# Altium PCB COMS0005_Coms_Test_Board.PcbDoc
Units mm, origin at the board's own origin, x right, y up, seen from the top; angles counter-clockwise.
Board outline 90 x 90 mm, 2 copper layers (Top Layer, Bottom Layer); 74 components, 93 nets, 358 pads, 74 vias.
Unrouted connection lines stored in the file: 2.
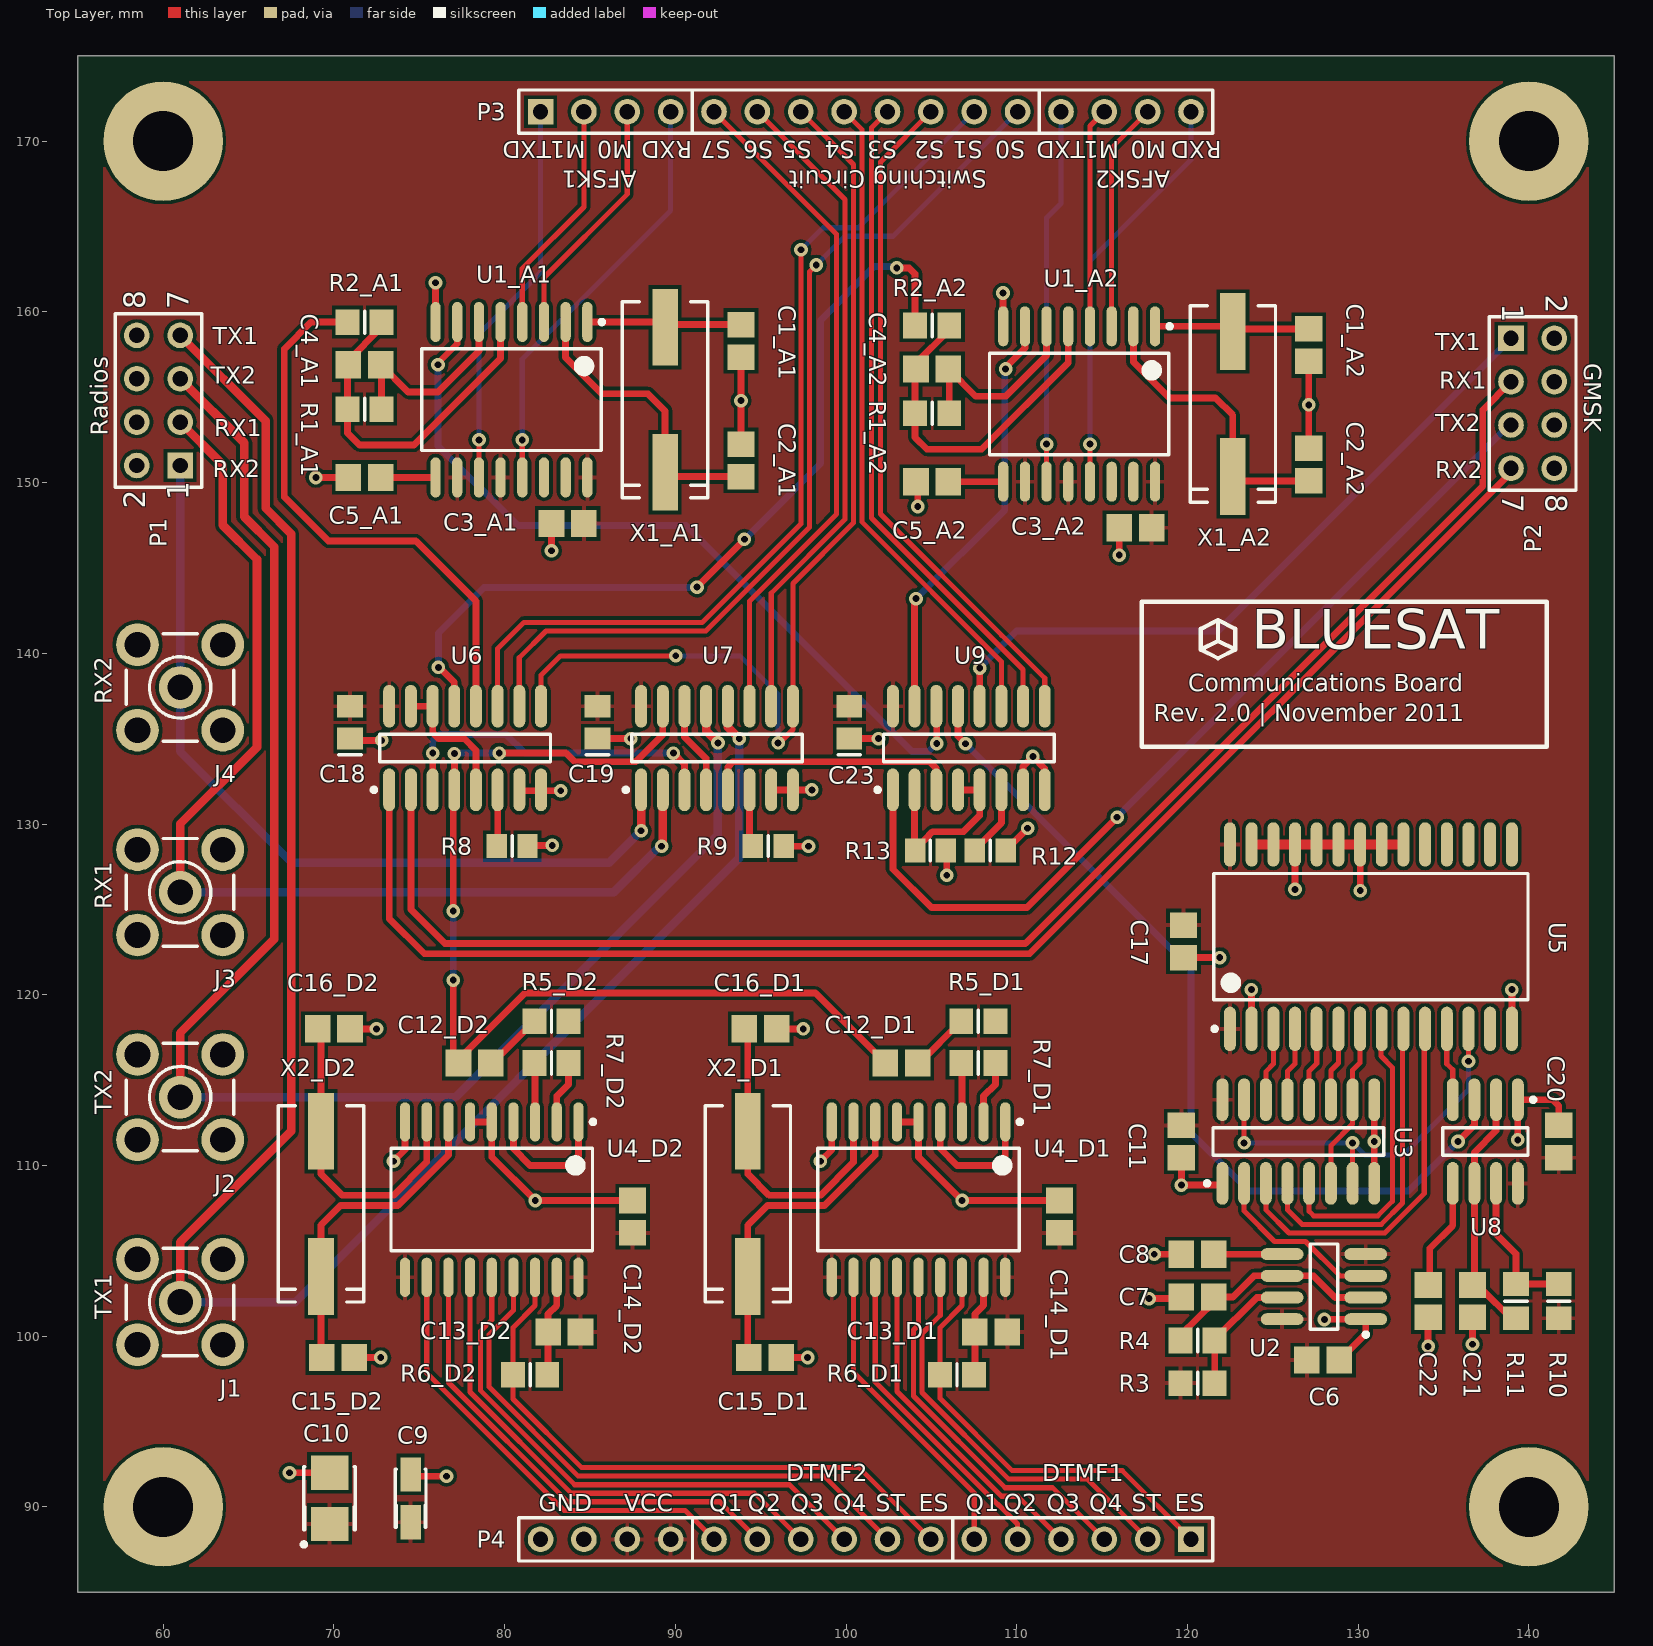
[diagram p0: Top Layer view]
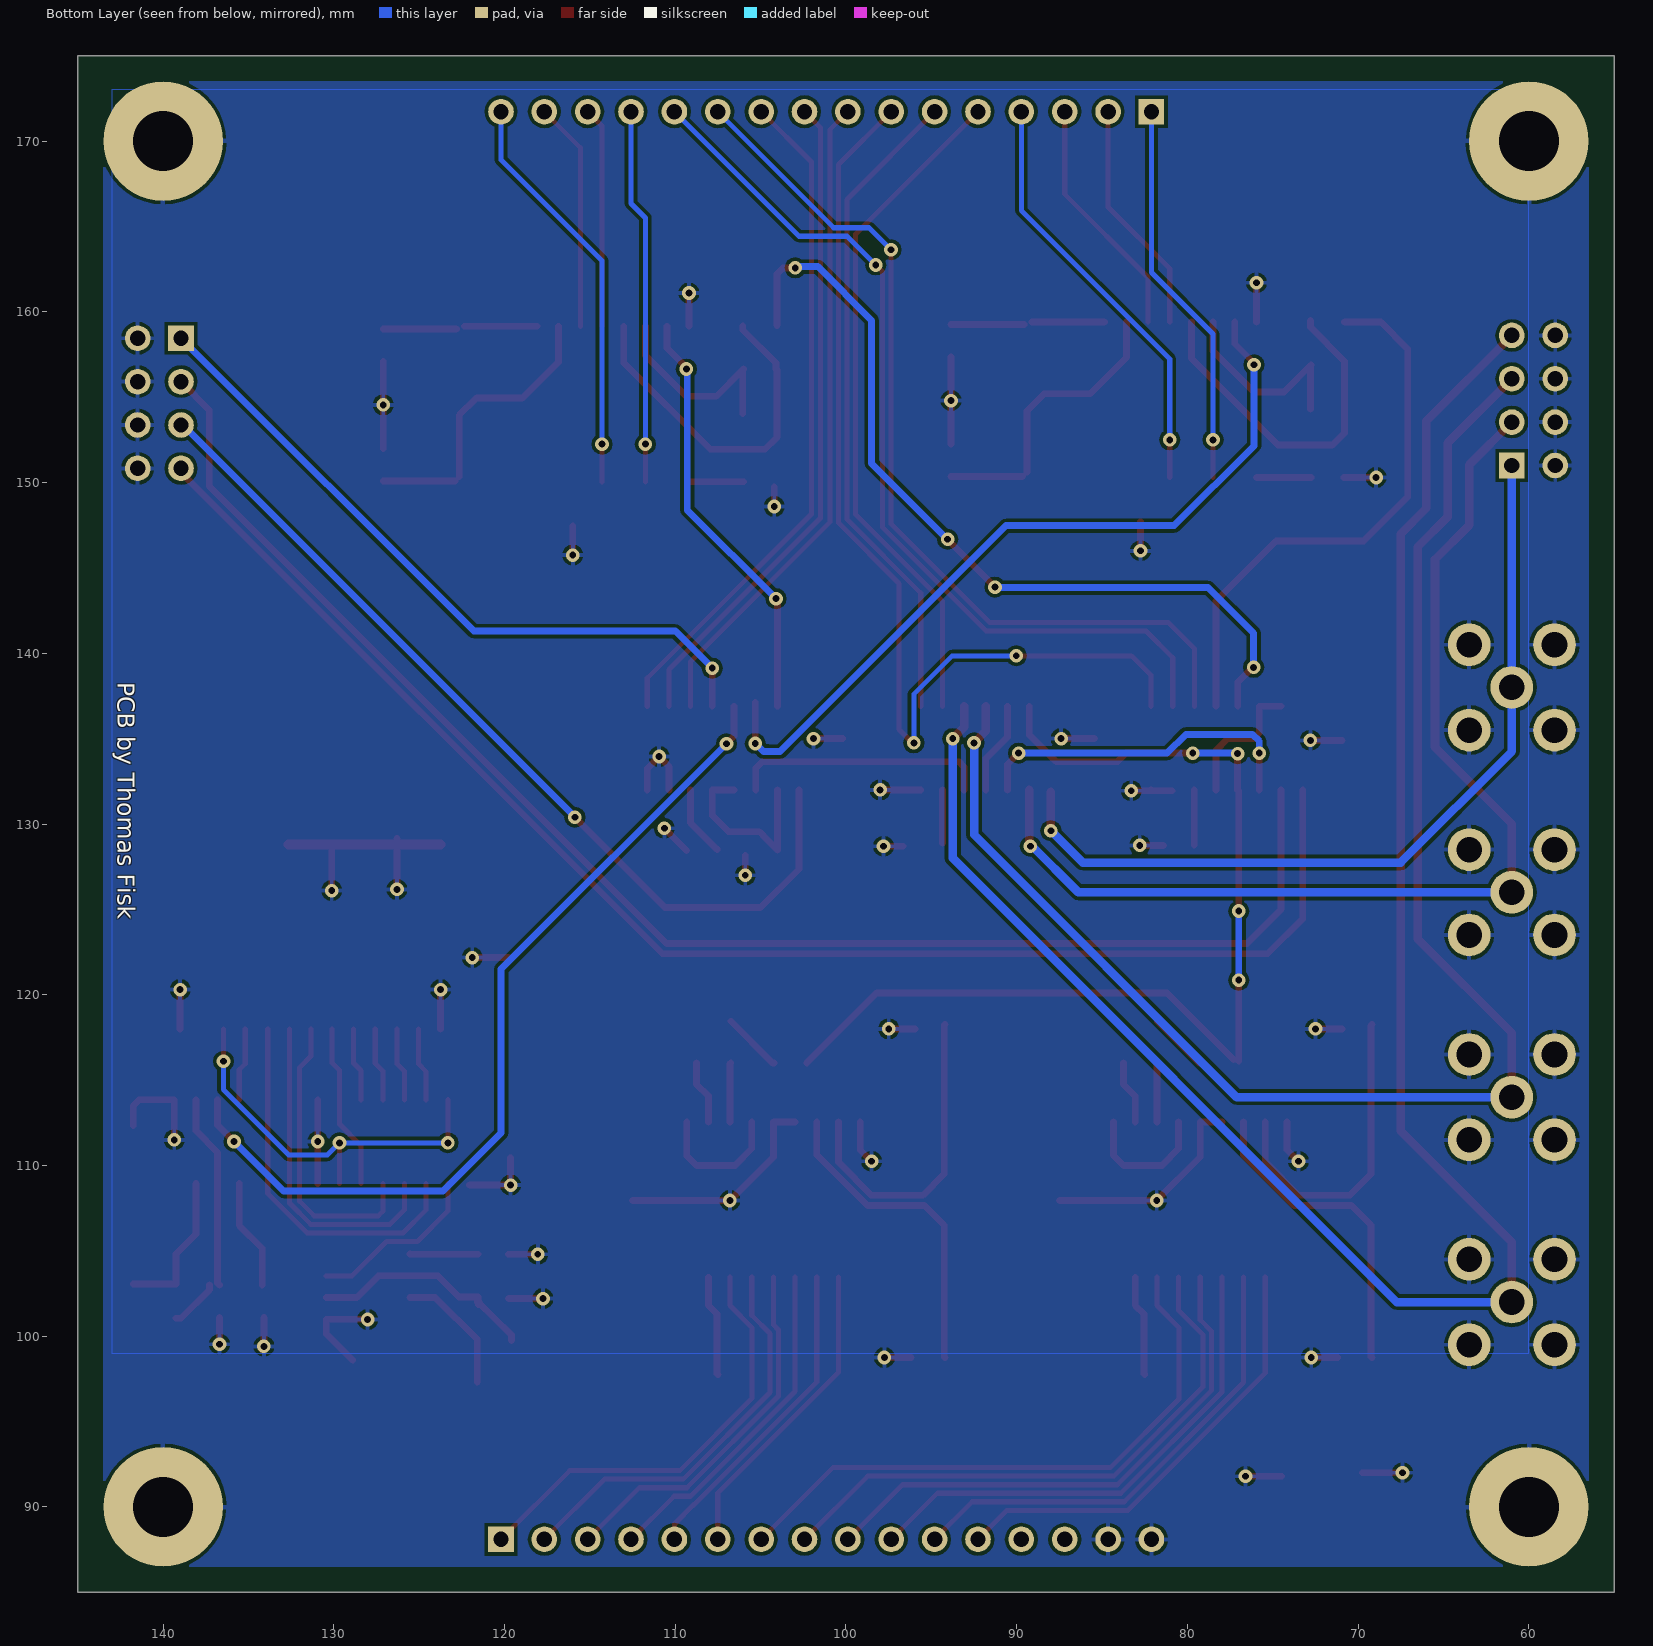
[diagram p1: Bottom Layer view, seen from below]

## Layer stack, top to bottom
Top Layer: signal copper 0.0356
Dielectric: dielectric 0.32, FR-4, Dk 4.8
Bottom Layer: signal copper 0.0356

## Board outline
55,175 145,175 145,85 55,85

## Design rules (kind name [scope] priority, off if disabled: settings)
AssemblyTestPointUsage [All] p1 off:
AssemblyTestpoint [All] p1 off: testpointundercomponent=TRUE minsize=1.016 maxsize=2.54 preferedsize=1.524 minholesize=0 maxholesize=1.016 preferedholesize=0.813 testpointgrid=0.025 usegrid=TRUE gridtolerance=0 allowsidetop=TRUE allowsidebottom=TRUE
Clearance [All] p1: gap=0.2
FabricationTestPointUsage [All] p1 off: valid=0 allowmultiple=FALSE
FabricationTestpoint [All] p1 off: side=3 testpointundercomponent=TRUE minsize=1.016 maxsize=2.54 preferedsize=1.524 minholesize=0 maxholesize=1.016 preferedholesize=0.813 testpointgrid=0.025 allowsidetop=TRUE allowsidebottom=TRUE usegrid=TRUE gridtolerance=0
HoleSize [All] p1: absolutevalues=TRUE maxlimit=6 minlimit=0.025 maxpercent=80.000 minpercent=20.000
MinimumSolderMaskSliver [All] p1: minsoldermaskwidth=0.19
PolygonConnect [All] p1: connectstyle=Relief reliefconductorwidth=0.254 reliefentries=4 polygonreliefangle="90 Angle"
RoomDefinition Switching_Circuit [InComponentClass('Components Class 1')] p1: confinementstyle=ConfineIn formatcopy=TRUE lockcomponents=FALSE outline 114.49,126.85 68.59,126.85 68.59,141.65 114.49,141.65
RoomDefinition D2 [InComponentClass('D2')] p2: confinementstyle=ConfineIn formatcopy=TRUE lockcomponents=FALSE outline 66.25,95 91,95 91,121.75 66.25,121.75
RoomDefinition D1 [InComponentClass('D1')] p3: confinementstyle=ConfineIn formatcopy=TRUE lockcomponents=FALSE outline 91.25,95 116,95 116,121.75 91.25,121.75
RoomDefinition Beacon [InComponentClass('Beacon')] p4: confinementstyle=ConfineIn formatcopy=TRUE lockcomponents=FALSE outline 114.87,95 145.345,95 145.345,131.175 114.87,131.175
RoomDefinition A2 [InComponentClass('A2')] p5: confinementstyle=ConfineIn formatcopy=TRUE lockcomponents=FALSE outline 100.25,144.75 131.05,144.75 131.05,163.75 100.25,163.75
RoomDefinition A1 [InComponentClass('A1')] p6: confinementstyle=ConfineIn formatcopy=TRUE lockcomponents=FALSE outline 67,145 97.8,145 97.8,164 67,164
RoutingVias [All] p1: holewidth=0.4 width=0.8 viastyle="Through Hole" minholewidth=0.4 minwidth=0.8 maxholewidth=0.4 maxwidth=0.8
SilkToSilkClearance [All] p1 off: silktosilkclearance=0.196
SilkscreenOverComponentPads [All] p1 off: minsilkscreentomaskgap=0.19
SolderMaskExpansion [All] p1: expansion=0.102
UnConnectedPin [All] p1 off:
Width [All] p1: maxlimit=1 minlimit=0.2 preferedwidth=0.2
20 further rules are at their usual default settings.

## Classes and differential pairs
component class A1: C1_A1 C2_A1 C3_A1 C4_A1 C5_A1 R1_A1 R2_A1 U1_A1 X1_A1
component class A2: C1_A2 C2_A2 C3_A2 C4_A2 C5_A2 R1_A2 R2_A2 U1_A2 X1_A2
component class COMS0005_Comms_Test_Board: C9 C10 J1 J2 J3 J4 P1 P2 P3 P4
component class D1: C12_D1 C13_D1 C14_D1 C15_D1 C16_D1 R5_D1 R6_D1 R7_D1 U4_D1 X2_D1
component class D2: C12_D2 C13_D2 C14_D2 C15_D2 C16_D2 R5_D2 R6_D2 R7_D2 U4_D2 X2_D2
net class ADDRESS[7..0]: ADDRESS0 ADDRESS1 ADDRESS2 ADDRESS3 ADDRESS4 ADDRESS5 ADDRESS6 ADDRESS7
net class SWC[7..0]: SWC0 SWC1 SWC2 SWC3 SWC4 SWC5 SWC6 SWC7
component class Beacon: C6 C7 C8 C11 C17 C20 C21 C22 R3 R4 R10 R11 U2 U3 U5 U8
channel class COMS0002_AFSK: A1 A2
channel class COMS0003_DTMF: D1 D2
component class U_ModemRXMux: C18 R8 U6
component class U_RadioMux: C19 R9 U7
component class U_TXDevMux: C23 R12 R13 U9

## Components (designator, comment, footprint, x,y, rotation, side; value= is the part's Value field where it differs from the comment)
C1_A1 "Cap" CAPC2012M 93.85,158.3 r90 top (schematic designator C1)
C1_A2 "Cap" CAPC2012M 127.1,158.05 r90 top (schematic designator C1)
C2_A1 "Cap" CAPC2012M 93.85,151.3 r270 top (schematic designator C2)
C2_A2 "Cap" CAPC2012M 127.1,151.05 r270 top (schematic designator C2)
C3_A1 "Cap" CAPC2012M 83.7,147.6 r180 top (schematic designator C3)
C3_A2 "Cap" CAPC2012M 116.95,147.35 r180 top (schematic designator C3)
C4_A1 "Cap" CAPC2012M 71.8,156.9 r180 top (schematic designator C4)
C4_A2 "Cap" CAPC2012M 105.05,156.65 r180 top (schematic designator C4)
C5_A1 "Cap" CAPC2012M 71.8,150.3 r0 top (schematic designator C5)
C5_A2 "Cap" CAPC2012M 105.05,150.05 r0 top (schematic designator C5)
C6 "C0805" CAPC2012M 127.945,98.6 r180 top
C7 "Cap1u" CAPC2012M 120.595,102.3 r0 top
C8 "Cap" CAPC2012M 120.595,104.8 r0 top
C9 "T491A" A 74.5,90.5 r90 top
C10 "T491B" B 69.75,90.5 r90 top
C11 "C0805" CAPC2012M 119.645,111.4 r90 top
C12_D1 "Cap" CAPC2012M 103.25,116 r180 top (schematic designator C12)
C12_D2 "Cap" CAPC2012M 78.25,116 r180 top (schematic designator C12)
C13_D1 "Cap" CAPC2012M 108.5,100.25 r0 top (schematic designator C13)
C13_D2 "Cap" CAPC2012M 83.5,100.25 r0 top (schematic designator C13)
C14_D1 "Cap" CAPC2012M 112.5,107 r90 top (schematic designator C14)
C14_D2 "Cap" CAPC2012M 87.5,107 r90 top (schematic designator C14)
C15_D1 "Cap" CAPC2012M 95.25,98.75 r0 top (schematic designator C15)
C15_D2 "Cap" CAPC2012M 70.25,98.75 r0 top (schematic designator C15)
C16_D1 "Cap" CAPC2012M 95,118 r0 top (schematic designator C16)
C16_D2 "Cap" CAPC2012M 70,118 r0 top (schematic designator C16)
C17 "C0805" CAPC2012M 119.77,123.125 r90 top
C18 "C1210" 0805 70.945,135.95 r90 top
C19 "C1210" 0805 85.445,135.95 r90 top
C20 "C0805" CAPC2012M 141.745,111.4 r270 top
C21 "Cap" CAPC2012M 136.695,102.05 r90 top
C22 "Cap" CAPC2012M 134.095,102.05 r90 top
C23 "C1210" 0805 100.195,135.95 r90 top
J1 "TX1" SMB_V-RJ45 61,102 r0 top (schematic designator J2)
J2 "TX2" SMB_V-RJ45 61,114 r180 top (schematic designator J4)
J3 "RX2" SMB_V-RJ45 61,126 r180 top (schematic designator J1)
J4 "RX1" SMB_V-RJ45 61,138 r0 top (schematic designator J3)
P1 "Header 4X2" HDR2X4 61,151 r90 top
P2 "Header 4X2" HDR2X4 138.95,158.45 r270 top
P3 "Header 16" HDR1X16 82.11,171.72 r0 top
P4 "Header 16" HDR1X16 120.21,88.1 r180 top
R1_A1 "Res1" RESC2012M 71.8,154.3 r180 top (schematic designator R1)
R1_A2 "Res1" RESC2012M 105.05,154.05 r180 top (schematic designator R1)
R2_A1 "Res1" RESC2012M 71.8,159.4 r0 top (schematic designator R2)
R2_A2 "Res1" RESC2012M 105.05,159.2 r0 top (schematic designator R2)
R3 "Res2" RESC2012M 120.595,97.25 r180 top
R4 "Res1" RESC2012M 120.595,99.75 r0 top
R5_D1 "Res1" RESC2012M 107.75,118.45 r180 top (schematic designator R5)
R5_D2 "Res1" RESC2012M 82.75,118.45 r180 top (schematic designator R5)
R6_D1 "Res1" RESC2012M 106.5,97.75 r0 top (schematic designator R6)
R6_D2 "Res1" RESC2012M 81.5,97.75 r0 top (schematic designator R6)
R7_D1 "Res1" RESC2012M 107.75,116 r0 top (schematic designator R7)
R7_D2 "Res1" RESC2012M 82.75,116 r0 top (schematic designator R7)
R8 "Res1" RESC2012N 80.445,128.7 r180 top
R9 "Res1" RESC2012N 95.445,128.7 r0 top
R10 "Res2" RESC2012M 141.745,102.05 r270 top
R11 "Res1" RESC2012M 139.245,102.05 r90 top
R12 "Res1" RESC2012N 108.445,128.45 r180 top
R13 "Res1" RESC2012N 104.945,128.45 r180 top
U1_A1 "MX614" SOIC127P1030X270-16N 80.405,154.85 r270 top (schematic designator U1)
U1_A2 "MX614" SOIC127P1030X270-16N 113.655,154.6 r270 top (schematic designator U1)
U2 "TLC555CD" D008_M 127.995,102.9 r180 top
U3 "HCC4520BF" SOIC16_M 126.495,111.4 r90 top
U4_D1 "MT88L70AS" SOIC18_N 104.25,108 r270 top (schematic designator U4)
U4_D2 "MT88L70AS" SOIC18_N 79.25,108 r270 top (schematic designator U4)
U5 "M27C256B-10B1" SOIC127P1199-28AM 130.745,123.4 r90 top
U6 "CD4053BCM" M16A_M 77.69,134.45 r90 top
U7 "CD4053BCM" M16A_M 92.445,134.45 r90 top
U8 "TLC555CD" D008_M 137.445,111.4 r270 top
U9 "CD4051BCM" M16A_M 107.195,134.45 r90 top
X1_A1 "3.579545 MHz" CSM-7 89.405,154.85 r90 top (schematic designator X1)
X1_A2 "3.579545 MHz" CSM-7 122.655,154.6 r90 top (schematic designator X1)
X2_D1 "3.579545 MHz" CSM-7 94.25,107.75 r90 top (schematic designator X2)
X2_D2 "3.579545 MHz" CSM-7 69.25,107.75 r90 top (schematic designator X2)

## Footprints (in the part's own frame and the unit in brackets; to place one, negate y for a bottom-side part, rotate by r counter-clockwise, add the part's x,y. Pads: shape width x height; smd on the part's side, far side on the other; paste and mask are expansions set on the pad)
0805 [mm] "Chip Capacitor; Body 2.0 x 1.2 mm (LxW typ)"
  rect 1.3x1.5 smd: 1(-0.95,0) 2(0.95,0)
  silkscreen extent -1.9,-0.65 -1.9,0.65
A [mm] "Capacitor, SM Tantalum; Body 3.2 x 1.6 mm (LxW typ)"
  rect 2x1.2 smd: 1(-1.4,0) 2(1.4,0)
  silkscreen extent -1.7,-0.9 1.7,0.9
B [mm] "Capacitor, SM Tantalum; Body 3.5 x 2.8 mm (LxW typ)"
  rect 2x2.2 smd: 1(-1.5,0) 2(1.5,0)
  silkscreen extent -2.82,-1.5 1.85,1.62
CAPC2012M [mm] "Chip Capacitor, Body 2.0x1.3mm, IPC Low Density"
  rect 1.5x1.6 smd: 1(-0.95,0) 2(0.95,0)
  body extent -1.1,-0.72 1.1,0.72, height 1.1
CSM-7 [mm] "Quartz Crystal, SM; 2 Leads; Body 11.4 x 4.8 x 5 mm (LxWxH)"
  rect 4.5x1.5 smd: 1(-4.25,0) 2(4.25,0)
  silkscreen extent -5.75,-2.5 5.75,2.5
D008_M [mm] "SOIC, 8-Leads, Body 4.9x3.9mm, Pitch 1.27mm, IPC Low Density"
  oval 2.5x0.7 smd: 1(-2.45,1.905) 2(-2.45,0.635) 3(-2.45,-0.635) 4(-2.45,-1.905) 5(2.45,-1.905) 6(2.45,-0.635) 7(2.45,0.635) 8(2.45,1.905)
  silkscreen extent -2.58,-2.5 0.8,2.93, body extent -2,-2.5 2,2.5, height 1.75
HDR1X16 [mm] "Connector; Header; 16 Position"
  rect 1.5x1.5 hole 0.9: 1(0,0)
  round 1.5 hole 0.9: 2(2.54,0) 3(5.08,0) 4(7.62,0) 5(10.16,0) 6(12.7,0) 7(15.24,0) 8(17.78,0) 9(20.32,0) 10(22.86,0) 11(25.4,0) 12(27.94,0) 13(30.48,0) 14(33.02,0) 15(35.56,0) 16(38.1,0)
  silkscreen extent -1.27,-1.27 39.37,1.27
HDR2X4 [mm] "Connector; Header; 4x2 Position"
  rect 1.5x1.5 hole 0.9: 1(0,0)
  round 1.5 hole 0.9: 2(0,2.54) 3(2.54,0) 4(2.54,2.54) 5(5.08,0) 6(5.08,2.54) 7(7.62,0) 8(7.62,2.54)
  silkscreen extent -1.27,-1.27 8.89,3.81
M16A_M [mm] "SOIC, 16-Leads, Body 9.9x3.9mm, Pitch 1.27mm, IPC Low Density"
  oval 2.5x0.7 smd: 1(-2.45,4.445) 2(-2.45,3.175) 3(-2.45,1.905) 4(-2.45,0.635) 5(-2.45,-0.635) 6(-2.45,-1.905) 7(-2.45,-3.175) 8(-2.45,-4.445) 9(2.45,-4.445) 10(2.45,-3.175) 11(2.45,-1.905) 12(2.45,-0.635) 13(2.45,0.635) 14(2.45,1.905) 15(2.45,3.175) 16(2.45,4.445)
  silkscreen extent -2.57,-5 0.8,5.47, body extent -2,-5 2,5, height 1.75
RESC2012M [mm] "Chip Resistor, Body 2.0x1.3mm, IPC Low Density"
  rect 1.4x1.5 smd: 1(-1,0) 2(1,0)
  silkscreen extent 0,-0.65 0,0.65, body extent -1.07,-0.7 1.07,0.7, height 0.65
RESC2012N [mm] "Chip Resistor, Body 2.0x1.3mm, IPC Medium Density"
  rect 1.2x1.4 smd: 1(-0.9,0) 2(0.9,0)
  silkscreen extent 0,-0.6 0,0.6, body extent -1.07,-0.7 1.07,0.7, height 0.65
SMB_V-RJ45 [mm] "Connector; SMB Straight"
  round 2.5 hole 1.5: 1(0,0) 2(-2.5,-2.5) 2(-2.5,2.5) 2(2.5,-2.5) 2(2.5,2.5)
  silkscreen extent -3.15,-3.15 3.15,3.15
SOIC16_M [mm] "SOIC, 16-Leads, Body 9.9x3.9mm, Pitch 1.27mm, IPC Low Density"
  oval 2.5x0.7 smd: 1(-2.45,4.445) 2(-2.45,3.175) 3(-2.45,1.905) 4(-2.45,0.635) 5(-2.45,-0.635) 6(-2.45,-1.905) 7(-2.45,-3.175) 8(-2.45,-4.445) 9(2.45,-4.445) 10(2.45,-3.175) 11(2.45,-1.905) 12(2.45,-0.635) 13(2.45,0.635) 14(2.45,1.905) 15(2.45,3.175) 16(2.45,4.445)
  silkscreen extent -2.57,-5 0.8,5.47, body extent -2,-5 2,5, height 1.91
SOIC18_N [mm] "SOIC, 18-Leads, Body 11.6x7.6mm, Pitch 1.27mm, IPC Medium Density"
  oval 2.3x0.6 smd: 1(-4.55,5.08) 2(-4.55,3.81) 3(-4.55,2.54) 4(-4.55,1.27) 5(-4.55,0) 6(-4.55,-1.27) 7(-4.55,-2.54) 8(-4.55,-3.81) 9(-4.55,-5.08) 10(4.55,-5.08) 11(4.55,-3.81) 12(4.55,-2.54) 13(4.55,-1.27) 14(4.55,0) 15(4.55,1.27) 16(4.55,2.54) 17(4.55,3.81) 18(4.55,5.08)
  silkscreen extent -4.67,-5.9 3,6.06, body extent -3.8,-5.95 3.8,5.95, height 2.65
SOIC127P1030X270-16N [mm] "SOIC, 16-Leads, Body 10.5x7.6mm (max), Pitch 1.27mm, IPC Medium Density"
  oval 2.35x0.6 smd: 1(-4.55,4.445) 2(-4.55,3.175) 3(-4.55,1.905) 4(-4.55,0.635) 5(-4.55,-0.635) 6(-4.55,-1.905) 7(-4.55,-3.175) 8(-4.55,-4.445) 9(4.55,-4.445) 10(4.55,-3.175) 11(4.55,-1.905) 12(4.55,-0.635) 13(4.55,0.635) 14(4.55,1.905) 15(4.55,3.175) 16(4.55,4.445)
  silkscreen extent -4.67,-5.25 2.97,5.42, body extent -3.8,-5.25 3.8,5.25, height 2.7
SOIC127P1199-28AM [mm] "SOIC, 28-Leads, Body 18.4x7.5mm, Pitch 1.27mm, IPC Low Density"
  oval 2.6x0.7 smd: 1(-5.4,8.255) 2(-5.4,6.985) 3(-5.4,5.715) 4(-5.4,4.445) 5(-5.4,3.175) 6(-5.4,1.905) 7(-5.4,0.635) 8(-5.4,-0.635) 9(-5.4,-1.905) 10(-5.4,-3.175) 11(-5.4,-4.445) 12(-5.4,-5.715) 13(-5.4,-6.985) 14(-5.4,-8.255) 15(5.4,-8.255) 16(5.4,-6.985) 17(5.4,-5.715) 18(5.4,-4.445) 19(5.4,-3.175) 20(5.4,-1.905) 21(5.4,-0.635) 22(5.4,0.635) 23(5.4,1.905) 24(5.4,3.175) 25(5.4,4.445) 26(5.4,5.715) 27(5.4,6.985) 28(5.4,8.255)
  silkscreen extent -5.52,-9.2 3.7,9.28, body extent -4.51,-9.25 4.51,9.25, height 2.8

## Part data
C1_A1 C1_A2 C2_A1 C2_A2 C3_A1 C3_A2 C4_A1 C4_A2 C5_A1 C5_A2 C8 C12_D1 C12_D2 C13_D1 C13_D2 C14_D1 C14_D2 C15_D1 C15_D2 C16_D1 C16_D2 C21 C22: "Capacitor"
C6 C7 C11 C17 C18 C19 C20 C23: library part Cap, "Capacitor"
C9 C10: "Solid Tantalum Chip Capacitor, Standard T491 Series - Industrial Grade"
J1 J2 J3 J4: library part COAX-F, "RF Coaxial PCB Connector, MCX; Thru-Hole, Right-Angle Mount Socket, Blunt Post Terminal, 50 Ohm Impedance"
P1 P2: "Header, 4-Pin, Dual row"
P3 P4: "Header, 16-Pin"
R1_A1 R1_A2 R2_A1 R2_A2 R4 R5_D1 R5_D2 R6_D1 R6_D2 R7_D1 R7_D2 R11: "Resistor"
R3 R10: library part Res1, "Resistor"
R8 R9 R12 R13: library part Res2, "Resistor"
U1_A1 U1_A2: "Bell 202 Compatible Modem"
U2 U8: "LinCMOS Timer"
U3: "Dual Binary Up-Counter"
U4_D1 U4_D2: "3 Volt Integrated DTMF Receiver"
U5: "256 Kbit (32Kb X 8) UV EPROM and OTP EPROM"
U6 U7: "Triple 2-Channnel Analog Multiplexer/Demutiplexer"
U9: "8-Channel Analog Multiplexer/Demultiplexer"
X1_A1 X1_A2 X2_D1 X2_D2: library part ECS-110-S-5P, "Crystal Oscillator"

## Free pads (board coordinates)
  round 7 hole 3.5: 0(60,90) 0(60,170) 0(140,90) 0(140,170)

## Via types
v1: diameter 0.8, hole 0.4, Top Layer to Bottom Layer, 73 vias
v2: diameter 0.8, hole 0.4, Top Layer to Bottom Layer, tented top, 1 vias

## Nets (pads, with @x,y where several pads share a name; then routed paths per layer and width w, separated by ;. In a path a pad name is that pad's centre, name@x,y a point inside that pad or via, vN(x,y) a via of type N, cw(c..) or ccw(c..) an arc to the next point about the centre after c; other vN are vias at no path point)
ADDRESS0: U3.3 U5.10 | length 22
  Top Layer w0.3: U3.3 124.59,107.4 125.94,106.05 131.559,106.05 133.87,108.361 U5.10@133.87,118
ADDRESS1: U3.4 U5.9 | length 19.4
  Top Layer w0.3: U3.4 125.86,107.4 126.71,106.55 131.352,106.55 132.6,107.798 U5.9@132.6,118
ADDRESS2: U3.5 U5.8 | length 17.3
  Top Layer w0.3: U3.5 127.13,107.315 127.395,107.05 131.145,107.05 132,107.905 132,115.745 131.33,116.415 U5.8@131.33,118
ADDRESS3: U3.6 U3.10 U5.7 | length 9.8
  Top Layer w0.3: U3.6 128.4,111.155 129.67,112.425 U3.10 129.67,115.575 130.11,116.015 U5.7
ADDRESS4: U3.11 U5.6 | length 4.3
  Top Layer w0.3: U3.11 128.4,115.555 128.84,115.995 U5.6
ADDRESS5: U3.12 U5.5 | length 4.3
  Top Layer w0.3: U3.12 127.13,115.535 127.57,115.975 U5.5
ADDRESS6: U3.13 U5.4 | length 4.3
  Top Layer w0.3: U3.13 125.86,115.515 126.3,115.955 U5.4
ADDRESS7: U3.14 U5.3 | length 4.3
  Top Layer w0.3: U3.14 124.59,115.495 125.03,115.935 U5.3
AF: U8.3 U9.13 | length 51.8
  Top Layer w0.4: U9.13 106.56,135.14 v1(107,134.7) ; v1(135.845,111.4) 136.81,112.365 U8.3
  Bottom Layer w0.4: v1(107,134.7) 120.2,121.5 120.2,111.9 123.6,108.5 132.945,108.5 v1(135.845,111.4)
AFSK1_M0: P3.3 U1_A1.3 | length 14.3
  Top Layer w0.3: U1_A1.3 82.31,162.01 87.19,166.89 P3.3
AFSK1_M1: P3.2 U1_A1.4 | length 13.8
  Top Layer w0.3: U1_A1.4 81.04,162.536 84.65,166.146 P3.2
AFSK1_RX: R2_A1.1 U6.12 | length 32.9
  Top Layer w0.4: R2_A1.1 68.675,159.4 67.1,157.825 67.1,149.15 69.675,146.575 74.8,146.575 78.325,143.05 U6.12
AFSK1_RXD: P3.4 U1_A1.13 | length 25
  Top Layer w0.3: U1_A1.13 v1(81.04,152.5)
  Bottom Layer w0.3: v1(81.04,152.5) 81.04,157.24 89.73,165.93 P3.4
AFSK1_TX: U1_A1.7 U9.14 | length 47
  Top Layer w0.4: v1@76,156.9 77.23,158.13 U1_A1.7 ; v1(105.315,134.715) U9.14@105.315,137.11
  Bottom Layer w0.4: v1(76.1,156.9) 76.1,152.15 80.775,147.475 90.625,147.475 103.861,134.239 104.839,134.239 v1(105.315,134.715)
AFSK1_TXD: P3.1 U1_A1.11 | length 22.9
  Top Layer w0.3: U1_A1.11 v1(78.5,152.5)
  Bottom Layer w0.3: v1(78.5,152.5) 78.5,158.7 82.11,162.31 P3.1
AFSK2_M0: P3.15 U1_A2.3 | length 13.4
  Top Layer w0.3: U1_A2.3 115.56,169.61 P3.15
AFSK2_M1: P3.14 U1_A2.4 | length 12.9
  Top Layer w0.3: U1_A2.4 114.29,170.88 P3.14
AFSK2_RX: R2_A2.1 U6.13 | length 49.5
  Top Layer w0.4: v1@76.125,139.225 77.055,138.295 U6.13 ; v1(91.275,143.875) v1@94.05,146.65 ; v1(102.975,162.575) 103.7,162.575 104.05,162.225 R2_A2.1
  Bottom Layer w0.4: v1(76.125,139.175) 76.125,141.174 78.801,143.85 v1@91.275,143.85 ; v1(94.05,146.675) 98.5,151.125 98.5,159.5 101.65,162.65 v1@102.925,162.65
AFSK2_RXD: P3.16 U1_A2.13 | length 24.1
  Top Layer w0.3: U1_A2.13 v1(114.29,152.25)
  Bottom Layer w0.3: v1(114.29,152.25) 114.29,162.99 120.21,168.91 P3.16
AFSK2_TX: U1_A2.7 U9.15 | length 25
  Top Layer w0.4: U9.15 104.02,143.12 v1(104.1,143.2) ; v1@109.25,156.65 110.48,157.88 U1_A2.7
  Bottom Layer w0.4: v1(104.1,143.2) 109.3,148.4 109.3,156.6 v1(109.35,156.65)
AFSK2_TXD: P3.13 U1_A2.11 | length 22
  Top Layer w0.3: U1_A2.11 v1(111.75,152.25)
  Bottom Layer w0.3: v1(111.75,152.25) 111.75,165.5 112.59,166.34 P3.13
COUNTER_CLK: U2.3 U3.2 | length 10.3
  Top Layer w0.3: U3.2 123.32,107.325 125.095,105.55 126.92,105.55 128.935,103.535 U2.3
DTMF1_EST: P4.1 R6_D1.1 U4_D1.16 | length 25.8
  Top Layer w0.3: U4_D1.16 106.79,101.79 105.5,100.5 R6_D1.1 105.5,96.361 109.736,92.125 116.185,92.125 P4.1
DTMF1_Q1: P4.6 U4_D1.11 | length 18.3
  Top Layer w0.3: U4_D1.11 100.44,97.885 107.51,90.815 P4.6
DTMF1_Q2: P4.5 U4_D1.12 | length 18.8
  Top Layer w0.3: U4_D1.12 101.71,97.322 108.907,90.125 108.925,90.125 110.05,89 P4.5
DTMF1_Q3: P4.4 U4_D1.13 | length 19.9
  Top Layer w0.3: U4_D1.13 102.98,96.759 109.114,90.625 110.065,90.625 P4.4
DTMF1_Q4: P4.3 U4_D1.14 | length 21.7
  Top Layer w0.3: U4_D1.14 104.25,100.664 103.95,100.364 103.95,96.496 109.321,91.125 112.105,91.125 P4.3
DTMF1_STD: P4.2 U4_D1.15 | length 24
  Top Layer w0.3: U4_D1.15 105.52,101.227 104.45,100.157 104.45,96.703 109.528,91.625 114.145,91.625 P4.2
DTMF2_EST: P4.7 R6_D2.1 U4_D2.16 | length 35.5
  Top Layer w0.3: U4_D2.16 81.79,101.79 80.5,100.5 R6_D2.1 80.5,96.325 84.525,92.3 100.77,92.3 P4.7
DTMF2_Q1: P4.12 U4_D2.11 | length 26.5
  Top Layer w0.3: U4_D2.11 75.44,97.849 83.489,89.8 90.57,89.8 P4.12
DTMF2_Q2: P4.11 U4_D2.12 | length 28.1
  Top Layer w0.3: U4_D2.12 76.71,97.287 83.697,90.3 92.61,90.3 P4.11
DTMF2_Q3: P4.10 U4_D2.13 | length 29.7
  Top Layer w0.3: U4_D2.13 77.98,96.724 83.904,90.8 94.65,90.8 P4.10
DTMF2_Q4: P4.9 U4_D2.14 | length 31.8
  Top Layer w0.3: U4_D2.14 79.25,100.957 78.6,100.307 78.6,96.811 84.111,91.3 96.69,91.3 P4.9
DTMF2_STD: P4.8 U4_D2.15 | length 34
  Top Layer w0.3: U4_D2.15 80.52,101.52 79.1,100.1 79.1,97.018 84.318,91.8 98.73,91.8 P4.8
DTMF_RX: C12_D1.2 C12_D2.2 U6.4 U7.15 | length 61
  Top Layer w0.4: C12_D2.2@77,116.1 v1(77,120.855) ; v1(77,124.9) U6.4@77,131.94 ; U6.4@77.06,132 v1(77.06,134.12) ; C12_D2.2@77.3,116.216 81.184,120.1 98.2,120.1 C12_D1.2 ; v1(79.69,134.15) 83.59,134.15 84.09,133.65 87.69,133.65 89.27,135.23 U7.15
  Bottom Layer w0.4: v1(77,120.855) v1(77,124.9) ; v1@77.09,134.15 v1(79.69,134.15)
GMSK1_RX: P2.3 U6.2 | length 88.5
  Top Layer w0.4: U6.2 74.515,124.985 76.5,123 110.5,123 137.3,149.8 137.3,154.26 P2.3
GMSK1_TX: P2.1 U9.12 | length 41.4
  Top Layer w0.4: U9.12 v1(107.83,139.13)
  Bottom Layer w0.4: v1(107.83,139.13) 110,141.3 121.8,141.3 P2.1
GMSK2_RX: P2.7 U6.1 | length 86
  Top Layer w0.4: U6.1 73.245,124.459 75.304,122.4 110.749,122.4 138.95,150.601 P2.7
GMSK2_TX: P2.5 U9.1 | length 53.5
  Top Layer w0.4: U9.1 102.75,127.35 105,125.1 110.6,125.1 v1@115.9,130.4
  Bottom Layer w0.4: v1(115.88,130.4) P2.5@138.9,153.42
GND: C1_A1.1 C1_A2.1 C2_A1.1 C2_A2.1 C3_A1.2 C3_A2.2 C5_A1.1 C5_A2.1 C6.1 C7.1 C8.1 C9.2 C10.2 C11.1 C14_D1.2 C14_D2.2 C15_D1.2 C15_D2.2 C16_D1.2 C16_D2.2 C17.1 C18.1 C19.1 C20.1 C21.1 C22.1 C23.1 J1.2 J2.2 J3.2 J4.2 P1.2 P1.4 P1.6 P1.8 P2.2 P2.4 P2.6 P2.8 P4.15 P4.16 pad.0 R8.1 R9.2 R12.1 R13.1 U1_A1.8 U1_A2.8 U2.1 U3.1 U3.8 U3.9 U4_D1.5 U4_D1.6 U4_D1.9 U4_D2.5 U4_D2.6 U4_D2.9 U5.2 U5.14 U5.20 U5.21 U5.22 U5.23 U5.24 U5.25 U5.26 U5.27 U6.7 U6.8 U7.7 U7.8 U8.1 U9.7 U9.8 | length 131.3
  Top Layer w0.4: v1(67.4,92) C10.2 ; v1(68.95,150.3) C5_A1.1 ; C18.1@70.945,134.9 v1(72.8,134.9) ; C16_D2.2 v1(72.5,118) ; C15_D2.2 v1(72.75,98.75) ; v1(73.5,110.25) 74.17,110.92 U4_D2.9 ; C9.2@74.5,91.8 v1(76.6,91.8) ; U1_A1.8 v1@75.96,161.81 ; U4_D2.6 U4_D2.5 79.25,110.5 v1(81.8,107.95) C14_D2.2 ; U6.7@80.915,131.95 U6.8@82.14,131.95 ; R8.1@81.395,128.75 v1(82.79,128.75) ; U6.8@82.14,132 U6.8@82.14,131.95 ; v1(82.75,146) C3_A1.2@82.75,147.7 ; v1(83.29,131.95) U6.8@82.14,131.95 ; C19.1 v1(87.4,135) ; C2_A1.1 C1_A1.1 ; U7.7 U7.8 ; C16_D1.2 v1(97.5,118) ; C15_D1.2 v1(97.75,98.75) ; R9.2@96.65,128.7 v1(97.8,128.7) ; U7.8@96.85,132 v1(98,132) ; v1(98.5,110.25) 99.17,110.92 U4_D1.9 ; C23.1 v1(101.9,135) ; U4_D1.6 U4_D1.5 104.25,110.5 v1(106.8,107.95) C14_D1.2 ; v1(104.2,148.6) C5_A2.1@104.2,149.75 ; v1(105.9,127) R13.1@105.9,128.15 ; U1_A2.8@109.2,159.15 v1(109.2,161.1) ; R12.1@109.342,128.452 v1(110.64,129.75) ; U9.7 110.37,133.375 v1(110.945,133.95) 111.64,133.255 U9.8 ; v1(116,145.75) C3_A2.2@116,147.45 ; v1(117.75,102.2) C7.1@119.77,102.2 ; v1@118,104.75 v1(118.05,104.8) C8.1@119.77,104.8 ; C11.1 v1(119.645,108.85) U3.1@122.05,108.85 ; C17.1 v1(121.895,122.175) ; U5.2 v1@123.76,120.285 ; v1(126.3,126.17) U5.25 U5.25@126.3,129.15 ; C2_A2.1 C1_A2.1 ; v1@128.065,100.995 U2.1 130.445,100.15 C6.1 ; v1(130.12,126.1) U5.22@130.12,128.765 ; U3.8 U3.9 ; C22.1 v1(134.095,99.405) v1@134.25,99.25 ; v1(136.695,99.525) C21.1 ; U5.14 v1(139,120.3) ; v2@139.35,111.505 U8.1 141.395,113.85 141.745,113.5 C20.1
  Top Layer w0.6: U5.27 U5.26 U5.25 U5.24 U5.23 U5.22 U5.21 U5.20
  other v1: 128.02,100.975 130.94,111.4 123.745,120.3 127.1,154.55 93.85,154.8 75.96,161.7
  other v2: 139.345,111.5
NetC1_A1_2: C1_A1.2 U1_A1.1 X1_A1.2 | length 8.5
  Top Layer w0.4: U1_A1.1 X1_A1.2@89.105,159.4 ; X1_A1.2@89.555,159.25 C1_A1.2
NetC1_A2_2: C1_A2.2 U1_A2.1 X1_A2.2 | length 8.5
  Top Layer w0.4: U1_A2.1 X1_A2.2@122.355,159.15 ; X1_A2.2@122.805,159 C1_A2.2
NetC2_A1_2: C2_A1.2 U1_A1.2 X1_A1.1 | length 17
  Top Layer w0.4: U1_A1.2 83.58,157.32 85.7,155.2 88.4,155.2 89.405,154.195 X1_A1.1 ; X1_A1.1@89.655,150.35 C2_A1.2
NetC2_A2_2: C2_A2.2 U1_A2.2 X1_A2.1 | length 17
  Top Layer w0.4: U1_A2.2 116.83,157.07 118.95,154.95 121.65,154.95 122.655,153.945 X1_A2.1 ; X1_A2.1@122.905,150.1 C2_A2.2
NetC4_A1_1: C4_A1.1 R1_A1.1 U1_A1.6 | length 11.7
  Top Layer w0.4: C4_A1.1 74.35,155.3 76.1,155.3 78.5,157.7 U1_A1.6 ; R1_A1.1 C4_A1.1@72.8,156.85
NetC4_A1_2: C4_A1.2 R1_A1.2 R2_A1.2 U1_A1.5 | length 20.9
  Top Layer w0.4: R2_A1.2@72.8,159.5 72.8,159.1 70.8,157.1 R1_A1.2 70.8,152.9 71.5,152.2 74.7,152.2 79.77,157.27 U1_A1.5
NetC4_A2_1: C4_A2.1 R1_A2.1 U1_A2.6 | length 11.7
  Top Layer w0.4: C4_A2.1 107.6,155.05 109.35,155.05 111.75,157.45 U1_A2.6 ; R1_A2.1 C4_A2.1@106.05,156.6
NetC4_A2_2: C4_A2.2 R1_A2.2 R2_A2.2 U1_A2.5 | length 20.8
  Top Layer w0.4: C4_A2.2@104.05,156.6 R1_A2.2 104.05,152.65 104.75,151.95 107.95,151.95 113.02,157.02 U1_A2.5 ; C4_A2.2 104.1,157 106.05,158.95 R2_A2.2@106.05,159.184
NetC5_A1_2: C5_A1.2 U1_A1.9 | length 3.2
  Top Layer w0.4: C5_A1.2 U1_A1.9
NetC5_A2_2: C5_A2.2 U1_A2.9 | length 3.2
  Top Layer w0.4: C5_A2.2 U1_A2.9
NetC7_2: C7.2 R4.1 U2.2 U2.6 | length 13.7
  Top Layer w0.4: R4.1 119.595,100.064 120.581,101.05 C7.2@121.545,102.014 ; C7.2@121.545,101.85 C7.2 ; C7.2@121.545,102.025 C7.2 ; U2.2 128.655,102.265 127.385,103.535 U2.6 123.905,103.535 122.67,102.3 C7.2
  Top Layer w0.5: C7.2@121.545,102.014 C7.2@121.545,102.025
NetC8_2: C8.2 U2.5 | length 4
  Top Layer w0.4: C8.2 125.54,104.8 U2.5
NetC12_D1_1: C12_D1.1 R5_D1.2 | length 3.6
  Top Layer w0.4: C12_D1.1 104.3,116 R5_D1.2
NetC12_D2_1: C12_D2.1 R5_D2.2 | length 3.6
  Top Layer w0.4: C12_D2.1 79.3,116 R5_D2.2
NetC13_D1_1: C13_D1.1 R6_D1.2 U4_D1.17 | length 5.9
  Top Layer w0.4: R6_D1.2 107.55,97.8 C13_D1.1 107.55,101.3 108.06,101.81 U4_D1.17
NetC13_D2_1: C13_D2.1 R6_D2.2 U4_D2.17 | length 5.9
  Top Layer w0.4: R6_D2.2 82.55,97.8 C13_D2.1 82.55,101.3 83.06,101.81 U4_D2.17
NetC15_D1_1: C15_D1.1 U4_D1.7 X2_D1.1 | length 18.9
  Top Layer w0.4: C15_D1.1@94.2,98.75 94.25,98.8 X2_D1.1 94.25,106.5 95.4,107.65 98.749,107.65 101.71,110.611 U4_D1.7
NetC15_D2_1: C15_D2.1 U4_D2.7 X2_D2.1 | length 18.9
  Top Layer w0.4: C15_D2.1@69.2,98.75 69.25,98.8 X2_D2.1 69.25,106.5 70.4,107.65 73.749,107.65 76.71,110.611 U4_D2.7
NetC16_D1_1: C16_D1.1 U4_D1.8 X2_D1.2 | length 18.6
  Top Layer w0.4: C16_D1.1@94.2,118.25 94.25,118.2 X2_D1.2 94.25,109.5 95.5,108.25 98.5,108.25 100.44,110.19 U4_D1.8
NetC16_D2_1: C16_D2.1 U4_D2.8 X2_D2.2 | length 18.6
  Top Layer w0.4: C16_D2.1@69.2,118.25 69.25,118.2 X2_D2.2 69.25,109.5 70.5,108.25 73.5,108.25 75.44,110.19 U4_D2.8
NetC21_2: C21.2 R11.1 U8.2 U8.6 | length 14.4
  Top Layer w0.4: C21.2@136.745,103.05 C21.2 136.81,103.115 U8.6 136.81,110.765 138.08,112.035 U8.2 ; C21.2@137.279,103 137.279,102.716 138.945,101.05 R11.1
NetC22_2: C22.2 U8.5 | length 6.5
  Top Layer w0.4: C22.2@134.195,103 134.195,105.15 135.54,106.495 U8.5
NetR3_1: R3.1 R4.2 U2.7 | length 7.5
  Top Layer w0.4: R3.1@121.595,97.3 121.595,99.8 124.06,102.265 U2.7
NetR5_D1_1: R5_D1.1 R7_D1.2 U4_D1.2 | length 3.7
  Top Layer w0.4: U4_D1.2 108.06,114.06 108.75,114.75 R7_D1.2
NetR5_D2_1: R5_D2.1 R7_D2.2 U4_D2.2 | length 3.7
  Top Layer w0.4: U4_D2.2 83.06,114.06 83.75,114.75 R7_D2.2
NetR7_D1_1: R7_D1.1 U4_D1.3 | length 3.5
  Top Layer w0.4: R7_D1.1 106.79,115.96 U4_D1.3
NetR7_D2_1: R7_D2.1 U4_D2.3 | length 3.5
  Top Layer w0.4: R7_D2.1 81.79,115.96 U4_D2.3
NetR8_2: R8.2 U6.6 | length 3.2
  Top Layer w0.4: R8.2@79.6,128.755 U6.6@79.6,132
NetR9_1: R9.1 U7.6 | length 3.1
  Top Layer w0.4: R9.1@94.35,128.895 U7.6
NetR10_1: R10.1 R11.2 U8.7 | length 8.9
  Top Layer w0.4: U8.7 138.08,105.99 139.245,104.825 R11.2 R10.1
NetR12_2: R12.2 U9.6 | length 4.2
  Top Layer w0.4: R12.2@107.545,128.55 107.545,128.516 109.1,130.071 U9.6
NetR13_2: R13.2 U9.2 U9.4 U9.5 | length 11
  Top Layer w0.4: U9.2 104.02,128.475 104.845,129.3 104.845,129.316 105.079,129.55 106.89,129.55 107.83,130.49 U9.5 U9.4
NetU4_D1_1: U4_D1.1 U4_D1.4 | length 8
  Top Layer w0.4: U4_D1.4 105.52,110.98 106.5,110 108.75,110 109.33,110.58 U4_D1.1
NetU4_D2_1: U4_D2.1 U4_D2.4 | length 8
  Top Layer w0.4: U4_D2.4 80.52,110.98 81.5,110 83.75,110 84.33,110.58 U4_D2.1
NetU6_3: U6.3 U7.3 | length 20
  Top Layer w0.4: U6.3@75.79,132 v1(75.79,134.15) ; v1(89.89,134.15) 90.54,133.5 U7.3
  Bottom Layer w0.4: v1(75.79,134.15) 75.79,134.85 76.19,135.25 80.09,135.25 81.19,134.15 v1(89.89,134.15)
NetU6_5: U6.5 U6.14 U6.15 | length 8.1
  Top Layer w0.4: U6.15@74.52,136.9 75.79,136.9 75.79,135.35 76.14,135 77.64,135 78.33,134.31 U6.5@78.33,132
NetU7_4: U7.4 U7.14 | length 5.4
  Top Layer w0.4: U7.14 90.54,135.1 91.81,133.83 U7.4
NetU7_5: U7.5 U9.3 | length 15.1
  Top Layer w0.4: U7.5 93.08,133.34 93.39,133.65 104.89,133.65 105.29,133.25 U9.3
RESET: U3.7 U3.15 U5.12 | length 23.9
  Top Layer w0.3: v1@123.32,111.475 U3.15 ; U3.7 v1(129.67,111.325) ; v1@136.46,116.285 136.445,116.3 136.445,115.95 136.46,115.935 U5.12
  Bottom Layer w0.3: v1(123.32,111.325) v1(129.67,111.325) 130.378,110.617 132.639,110.617 136.46,114.438 v1(136.46,116.1)
RX1: J3.1 P1.3 U7.2 | length 63.9
  Top Layer w0.5: J3.1 61,130 65.5,134.5 65.5,145.5 63.5,147.5 63.5,151.04 P1.3 ; v1@89.27,128.7 U7.2
  Bottom Layer w0.5: J3.1 86.4,126 v1@89.2,128.8
  other v1: 89.2,128.7
RX2: J4.1 P1.1 U7.1 | length 49.5
  Top Layer w0.5: v1(88,129.6) U7.1@88,131.9
  Bottom Layer w0.5: P1.1 J4.1 61,134.25 67.513,127.737 86.137,127.737 v1(88,129.6)
SWC0: P3.12 U6.10 | length 54
  Top Layer w0.3: U6.10 80.865,139.74 82.425,141.3 91.782,141.3 97.862,147.38 97.862,162.345 v1(98.259,162.741)
  Bottom Layer w0.3: v1(98.259,162.741) 99.943,164.425 102.755,164.425 P3.12
SWC1: P3.11 U6.11 | length 53.7
  Top Layer w0.3: U6.11 79.595,140.266 81.129,141.8 91.575,141.8 97.363,147.588 v1(97.363,163.638)
  Bottom Layer w0.3: v1(97.363,163.638) 98.65,164.925 100.715,164.925 P3.11
SWC2: P3.10 U9.9 | length 40
  Top Layer w0.3: P3.10 102.025,168.775 102.025,148.15 109.125,141.05 111.64,138.535 U9.9
SWC3: P3.9 U9.10 | length 38.9
  Top Layer w0.3: P3.9 101.495,170.785 101.495,147.93 110.37,139.055 U9.10
SWC4: P3.8 U9.11 | length 38.6
  Top Layer w0.3: P3.8 100.947,170.663 100.947,147.678 109.1,139.525 U9.11
SWC5: P3.7 U6.9 U7.9 | length 60.1
  Top Layer w0.3: U6.9 82.135,138.71 83.275,139.85 v1(90.025,139.85) ; v1(96.025,134.75) 96.1,134.75 96.89,135.54 U7.9 96.89,144.083 100.447,147.64 100.447,168.623 P3.7
  Bottom Layer w0.3: v1(90.025,139.85) 93.775,139.85 96.025,137.6 v1(96.025,134.75)
SWC6: P3.6 U7.10 | length 38.7
  Top Layer w0.3: P3.6 99.947,166.583 99.947,147.847 95.62,143.52 U7.10
SWC7: P3.5 U7.11 | length 39.9
  Top Layer w0.3: P3.5 99.447,164.543 99.447,148.147 94.35,143.05 U7.11
TONE_ON: U5.11 U8.4 | length 4.3
  Top Layer w0.3: U5.11 135.19,115.955 135.54,115.605 U8.4
TX1: J1.1 P1.7 U7.12 | length 115.1
  Top Layer w0.5: P1.7@60.64,158.62 P1.7 66,153.62 66,148.5 67.5,147 67.5,112 61,105.5 J1.1 ; U7.12 93.08,135.67 v1(93.75,135)
  Bottom Layer w0.5: J1.1 67.75,102 93.75,128 v1(93.75,135)
TX2: J2.1 P1.5 U7.13 | length 92.2
  Top Layer w0.5: J2.1 61,117.75 66.5,123.25 66.5,146.25 64.75,148 64.75,152.33 P1.5 ; U7.13 91.81,135.44 v1(92.5,134.75)
  Bottom Layer w0.5: J2.1@61.25,113.75 61.5,114 77.119,114 92.5,129.381 v1(92.5,134.75)
VCC: C3_A1.1 C3_A2.1 C6.2 C9.1 C10.1 C11.2 C13_D1.2 C13_D2.2 C14_D1.1 C14_D2.1 C17.2 C18.2 C19.2 C20.2 C23.2 P4.13 P4.14 R3.2 R10.2 U1_A1.10 U1_A1.12 U1_A1.16 U1_A2.10 U1_A2.12 U1_A2.16 U2.4 U2.8 U3.16 U4_D1.10 U4_D1.18 U4_D2.10 U4_D2.18 U5.1 U5.28 U6.16 U7.16 U8.8 U9.16
pads on no net: U1_A1.14 U1_A1.15 U1_A2.14 U1_A2.15 U5.13 U5.15 U5.16 U5.17 U5.18 U5.19

## Polygon pours and split planes (outlines as drawn)
GND on Bottom Layer "Bottom Layer-No Net" (solid, remove dead copper, shelved, pour order 6): 60,173 143,173 143,99 60,99
VCC on Top Layer "Top Layer-No Net" (solid, remove dead copper, pour order 5): 56.5,173.5 143.5,173.5 143.5,86.5 56.5,86.5
GND on Bottom Layer "Top Layer-No Net" (solid, remove dead copper, pour order 7): 56.5,173.5 143.5,173.5 143.5,86.5 56.5,86.5

## Silkscreen, mask and mechanical layers (free items; w line width, h text height)
Top Overlay:
  lines w0.2: 90.989,170.45 90.989,172.974 ; 91.008,86.833 91.008,89.357 ; 106.248,86.833 106.248,89.357 ; 111.328,170.45 111.328,172.974
  lines w0.254: 120.776,140.216 121.792,139.708 122.808,140.216 ; 120.776,140.216 120.776,141.434 121.792,141.942 ; 120.776,140.216 121.792,140.724 ; 121.792,140.724 121.792,141.942 ; 121.792,140.724 122.808,140.216 ; 121.792,141.942 122.808,141.434 122.808,140.216 ; 117.319,134.518 117.319,143.024 141.047,143.024 141.047,134.518 117.319,134.518
  text "TXD" at 82.75,170 h1 r180
  text "M1" at 84.75,170 h1 r180
  text "M0" at 87.5,170 h1 r180
  text "RXD" at 91,170 h1 r180
  text "S7" at 93.25,170 h1 r180
  text "S6" at 95.75,170 h1 r180
  text "S5" at 98,170 h1 r180
  text "S4" at 100.5,170 h1 r180
  text "S3" at 103,170 h1 r180
  text "S2" at 105.75,170 h1 r180
  text "S1" at 108,170 h1 r180
  text "S0" at 110.5,170 h1 r180
  text "TXD" at 114,170 h1 r180
  text "M1" at 116,170 h1 r180
  text "M0" at 118.75,170 h1 r180
  text "RXD" at 122,170 h1 r180
  text "AFSK1" at 87.75,168.25 h1 r180
  text "Switching Circuit" at 108.25,168.25 h1 r180
  text "AFSK2" at 119,168.25 h1 r180
  text "TX1" at 62.9,158.1 h1
  text "TX1" at 134.5,157.75 h1
  text "GMSK" at 143.25,157 h1 r270
  text "TX2" at 62.8,155.8 h1
  text "RX1" at 134.75,155.5 h1
  text "TX2" at 134.5,153 h1
  text "Radios" at 56.75,152.75 h1 r90
  text "RX1" at 63,152.7 h1
  text "RX2" at 62.9,150.3 h1
  text "RX2" at 134.5,150.25 h1
  text "BLUESAT" at 123.78,139.508 h4
  text "Communications Board" at 120.047,137.774 h1
  text "RX2" at 57,137 h1 r90
  text "Rev. 2.0 | November 2011" at 118.034,136.017 h1
  text "RX1" at 57,125 h1 r90
  text "TX2" at 57,113 h1 r90
  text "TX1" at 57,101 h1 r90
  text "DTMF2" at 96.5,91.5 h1
  text "DTMF1" at 111.5,91.5 h1
  text "GND" at 82,89.75 h1
  text "VCC" at 87,89.75 h1
  text "Q1" at 92,89.75 h1
  text "Q2" at 94.25,89.75 h1
  text "Q3" at 96.75,89.75 h1
  text "Q4" at 99.25,89.75 h1
  text "ST" at 101.75,89.75 h1
  text "ES" at 104.25,89.75 h1
  text "Q1" at 107,89.75 h1
  text "Q2" at 109.25,89.75 h1
  text "Q3" at 111.75,89.75 h1
  text "Q4" at 114.25,89.75 h1
  text "ST" at 116.75,89.75 h1
  text "ES" at 119.25,89.75 h1
Bottom Overlay:
  text "PCB by Thomas Fisk" at 142.646,138.303 h1 r90
Mechanical 1:
  the board outline again, w0.254

## Text inside footprints (layer, text, board x,y; h text height)
P1: Top Overlay "8" at 58.968,160.144 h1.27 r90; Top Overlay "7" at 61.508,160.144 h1.27 r90; Top Overlay "1" at 61.508,148.968 h1.27 r90; Top Overlay "2" at 58.968,148.46 h1.27 r90
P2: Top Overlay "8" at 140.982,149.306 h1.27 r270; Top Overlay "7" at 138.442,149.306 h1.27 r270; Top Overlay "1" at 138.442,160.482 h1.27 r270; Top Overlay "2" at 140.982,160.99 h1.27 r270